# Altium PCB AL104_master_v10.PcbDoc
Units mm, origin at the board's own origin, x right, y up, seen from the top; angles counter-clockwise.
Board outline 160 x 70 mm, 2 copper layers (Top Layer, Bottom Layer); 32 components, 27 nets, 132 pads, 18 vias.
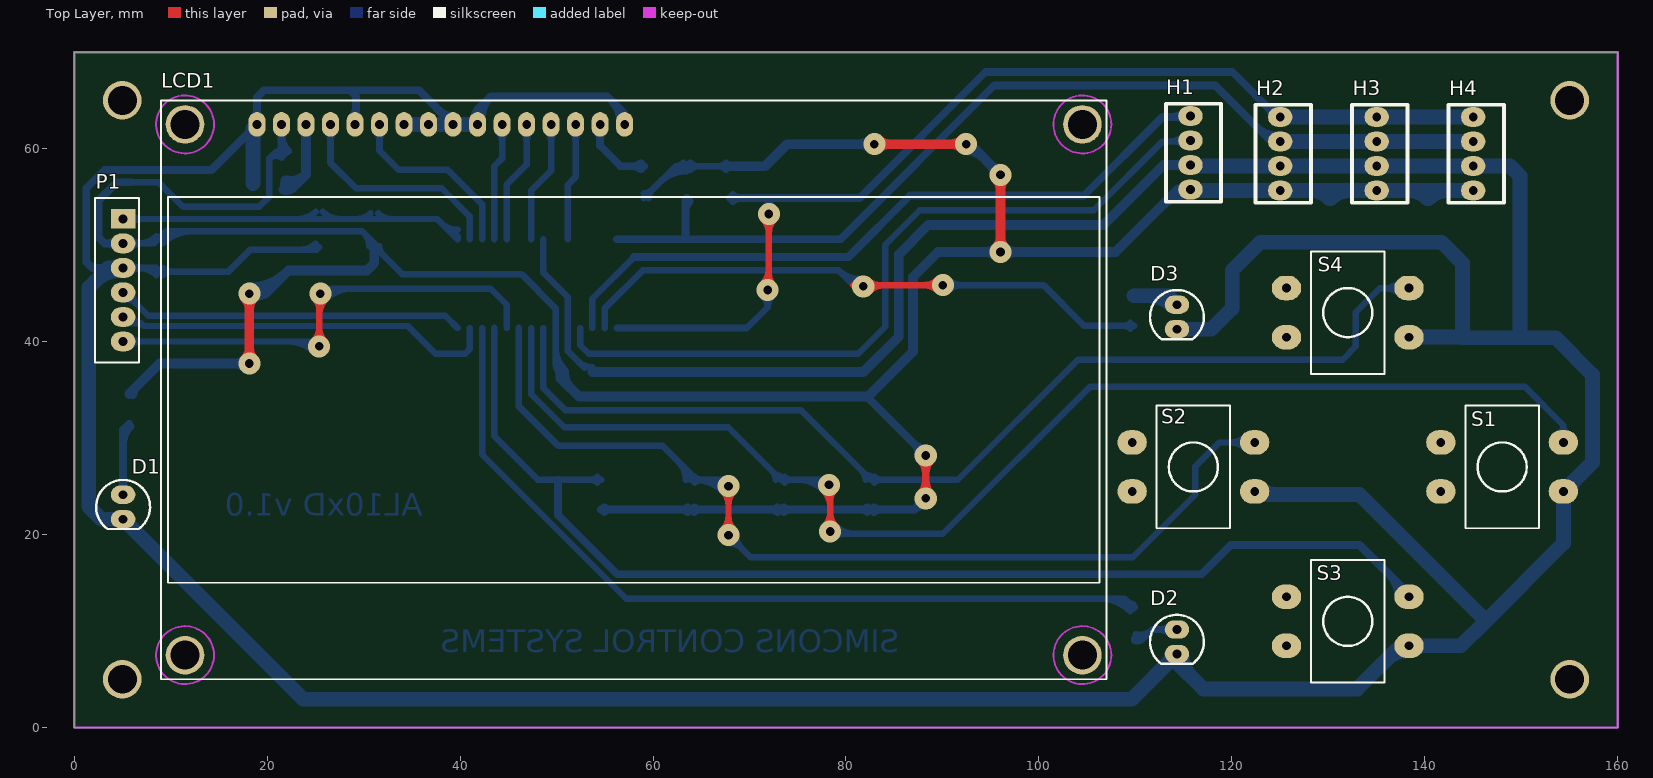
[diagram p0: Top Layer view]
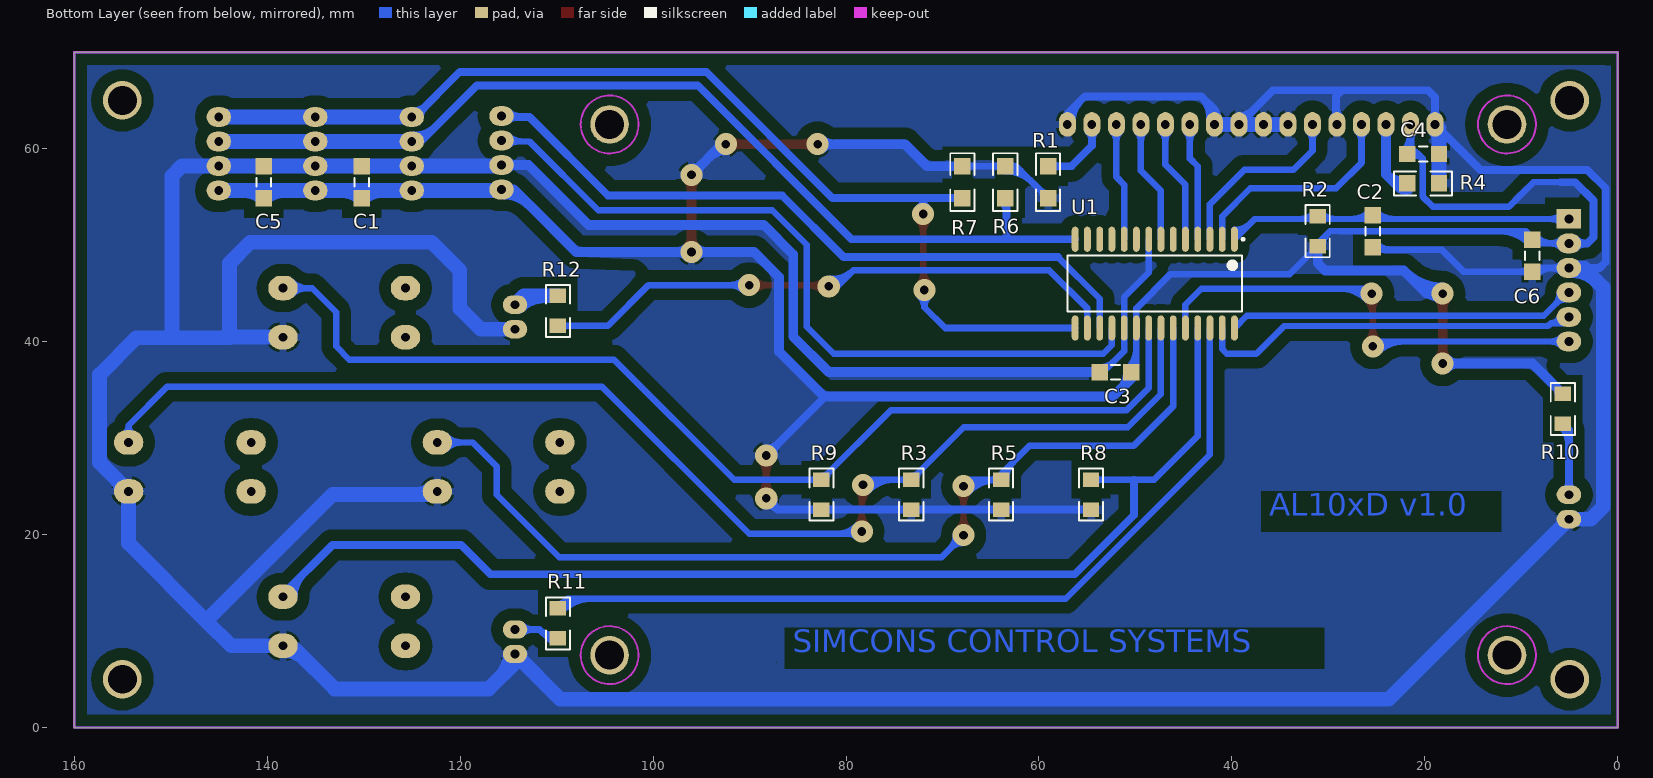
[diagram p1: Bottom Layer view, seen from below]
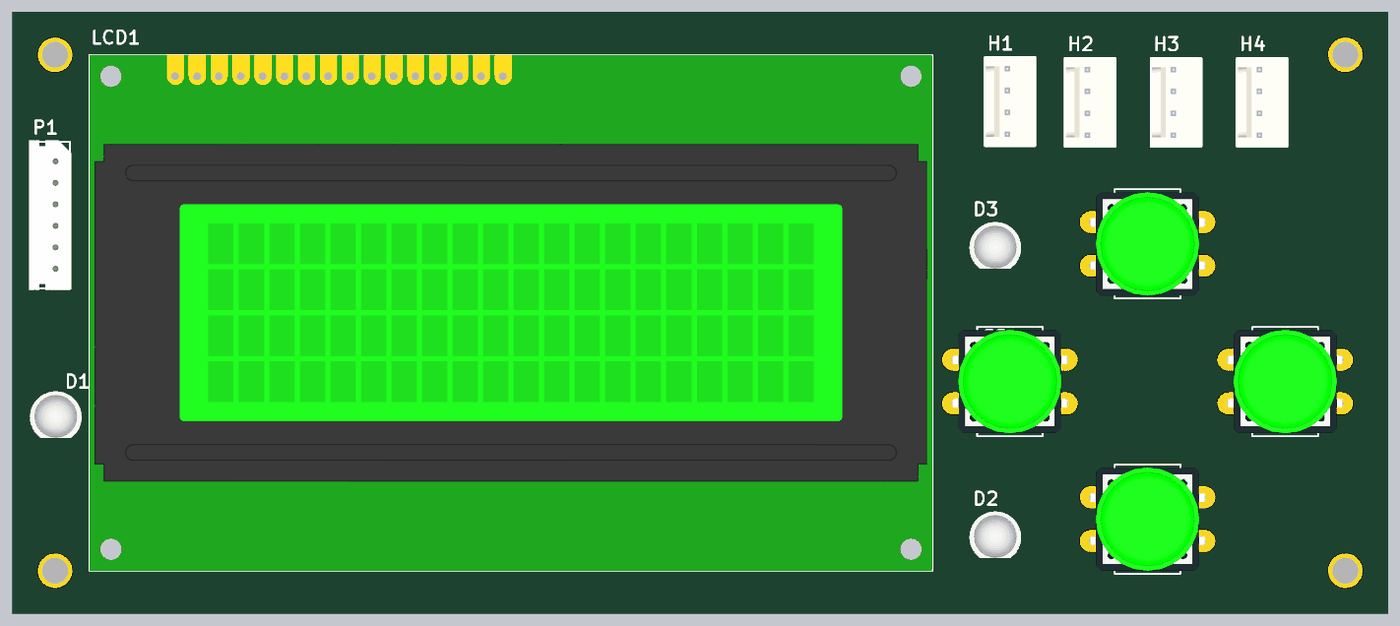
[diagram p2: 3D render of the assembled board from above, using the file's embedded part models]
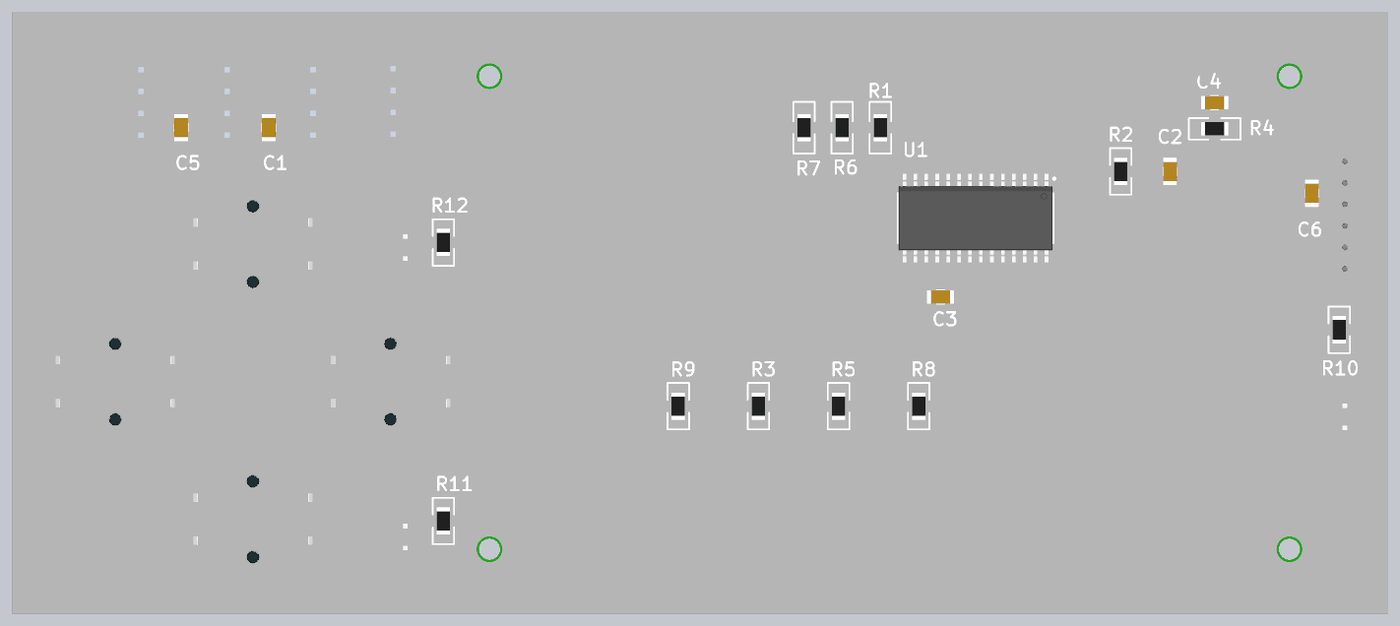
[diagram p3: 3D render of the assembled board from below, using the file's embedded part models]

## Layer stack, top to bottom
Top Solder: solder mask 0.0102, Solder Resist, Dk 3.5
Top Layer: signal copper 0.0356
Dielectric 1: dielectric 0.32, FR-4, Dk 4.8
Bottom Layer: signal copper 0.0356
Bottom Solder: solder mask 0.0102, Solder Resist, Dk 3.5

## Board outline
0,0 160,0 160,70 0,70

## Design rules (kind name [scope] priority, off if disabled: settings)
Clearance [All] p1: gap=0.406
PlaneConnect [All] p1: planeconnectstyle=Relief reliefexpansion=0.508 reliefentries=4 reliefconductorwidth=0.813 reliefairgap=0.254
PolygonConnect [All] p1: connectstyle=Relief reliefconductorwidth=0.813 reliefentries=4 polygonreliefangle="90 Angle" airgapwidth=0.254
RoutingVias [All] p1: holewidth=0.9 width=2.286 viastyle="Through Hole" minholewidth=0.9 minwidth=2.286 maxholewidth=3 maxwidth=4
SolderMaskExpansion [All] p1: expansion=0.102
Width [All] p1: maxlimit=1.524 minlimit=0.406 preferedwidth=0.457
28 further rules are at their usual default settings.

## Components (designator, comment, footprint, x,y, rotation, side; value= is the part's Value field where it differs from the comment)
C1 ".1uF 1206" C1206_S 130.175,56.515 r270 bottom
C2 ".1uF 1206" C1206_S 25.4,51.435 r90 bottom
C3 ".1uF 1206" C1206_S 52.07,36.83 r180 bottom
C4 ".1uF 1206" C1206_S 20.193,59.436 r0 bottom
C5 ".1uF 1206" C1206_S 140.335,56.515 r270 bottom
C6 ".1uF 1206" C1206_S 8.89,48.895 r90 bottom
D1 "LED0" LED5mmGREEN 5.08,22.86 r0 top
D2 "LED0" LED5mmGREEN 114.3,8.89 r0 top
D3 "LED0" LED5mmGREEN 114.3,42.545 r0 top
H1 "Header 4" CONNDEBUG 115.697,59.563 r0 top
H2 "Header 4" CONNDEBUG 125,59.46 r0 top
H3 "Header 4" CONNDEBUG 135,59.46 r0 top
H4 "Header 4" CONNDEBUG 145,59.46 r0 top
LCD1 "JHD 162A" LCD20X4 58,35 r0 top locked
P1 "Header, 6-Pin" CON_ICSP 5.08,52.705 r270 top
R1 "470E 1206" R1206 59.055,56.515 r270 bottom
R2 "100K 1206" R1206_W 31.115,51.435 r90 bottom
R3 "100K 1206" R1206_W 73.237,24.13 r90 bottom
R4 "470E 1206" R1206 20.193,56.388 r180 bottom
R5 "100K 1206" R1206_W 63.923,24.13 r90 bottom
R6 "4.7K 1206" R1206_S 63.5,56.515 r270 bottom
R7 "4.7K 1206" R1206_S 67.945,56.515 r270 bottom
R8 "100K 1206" R1206_W 54.61,24.13 r90 bottom
R9 "100K 1206" R1206_W 82.55,24.13 r90 bottom
R10 "100K 1206" R1206_W 5.715,33.02 r270 bottom
R11 "100K 1206" R1206_W 109.855,10.795 r270 bottom
R12 "100K 1206" R1206_W 109.855,43.18 r90 bottom
S1 "8MM DOM SWITCH" SWITCH_1 148,27 r180 top
S2 "8MM DOM SWITCH" SWITCH_1 116,27 r180 top
S3 "8MM DOM SWITCH" SWITCH_1 132,11 r180 top
S4 "8MM DOM SWITCH" SWITCH_1 132,43 r180 top
U1 "PIC16F886-I/SO" SOIC-SO28_M 48,46 r270 bottom

## Footprints (in the part's own frame and the unit in brackets; to place one, negate y for a bottom-side part, rotate by r counter-clockwise, add the part's x,y. Pads: shape width x height; smd on the part's side, far side on the other; paste and mask are expansions set on the pad)
C1206_S [mm] "Chip Capacitor, Body 3.2x1.6mm, IPC High Density"
  rect 1.7x1.7 smd: 1(-1.65,0) 2(1.65,0)
  silkscreen extent -0.44,-0.76 0.44,0.76, body extent -1.6,-0.8 1.6,0.8, height 1
CON_ICSP [mm] "Connector; Header; 6 Position"
  rect 2.032x2.54 hole 0.9: 1(0,0)
  oval 2.032x2.54 hole 0.9: 2(2.54,0) 3(5.08,0) 4(7.62,0) 5(10.16,0) 6(12.7,0)
  silkscreen extent -2.16,-2.92 14.86,1.65, body extent -2.35,-3.1 15.05,1.8, height 5.95
CONNDEBUG [mm] "Debug Connector"
  oval 2.54x2.032 hole 0.9: 1(0,3.81) 2(0,1.27) 3(0,-1.27) 4(0,-3.81)
  silkscreen extent -2.54,-5.08 3.17,5.08, body extent -2.49,-5.08 3.31,5.08, height 11.66
LCD20X4 [mm]
  oval 1.778x2.54 hole 0.9: 1(-39.04,27.5) 2(-36.5,27.5) 3(-33.96,27.5) 4(-31.42,27.5) 5(-28.88,27.5) 6(-26.34,27.5) 7(-23.8,27.5) 8(-21.26,27.5) 9(-18.72,27.5) 10(-16.18,27.5) 11(-13.64,27.5) 12(-11.1,27.5) 13(-8.56,27.5) 14(-6.02,27.5) 15(-3.48,27.5) 16(-0.94,27.5)
  round 4 hole 3 unplated: M1(-46.5,27.5) M2(46.5,27.5) M3(-46.5,-27.5) M4(46.5,-27.5)
  Keep-Out Layer circle w0.2: c46.5,27.5 r3
  Keep-Out Layer circle w0.2: c46.5,-27.5 r3
  Keep-Out Layer circle w0.2: c-46.5,-27.5 r3
  Keep-Out Layer circle w0.2: c-46.5,27.5 r3
  silkscreen extent -49,-30 49,30, body extent -49,-30 49,30, height 14.6
LED5mmGREEN [mm]
  oval 2.54x1.905 hole 0.9: 1(0,1.27) 2(0,-1.27)
  silkscreen extent -2.79,-2.29 2.79,2.79, body extent -3.01,-2.41 3.01,3.01, height 12.31
R1206 [mm] "Chip Capacitor, Body 3.2x1.6mm, IPC High Density"
  rect 1.7x1.7 smd: 1(-1.65,0) 2(1.65,0)
  silkscreen extent -3,-1.25 3,1.25, body extent -1.59,-0.77 1.59,0.77, height 0.63
R1206_S [mm] "Chip Capacitor, Body 3.2x1.6mm, IPC High Density"
  rect 1.7x1.7 smd: 1(-1.65,0) 2(1.65,0)
  silkscreen extent -3,-1.25 3,1.25, body extent -1.59,-0.77 1.59,0.77, height 0.63
R1206_W [mm] "Chip Capacitor, Body 3.2x1.6mm, IPC High Density"
  rect 1.5x1.7 smd: 1(-1.55,0) 2(1.55,0)
  silkscreen extent -2.7,-1.25 2.7,1.25, body extent -1.59,-0.77 1.59,0.77, height 0.63
SOIC-SO28_M [mm] "SOIC, 28-Leads, Body 17.9x7.5mm, Pitch 1.27mm, IPC Low Density"
  oval 2.6x0.7 smd: 1(-4.6,8.255) 2(-4.6,6.985) 3(-4.6,5.715) 4(-4.6,4.445) 5(-4.6,3.175) 6(-4.6,1.905) 7(-4.6,0.635) 8(-4.6,-0.635) 9(-4.6,-1.905) 10(-4.6,-3.175) 11(-4.6,-4.445) 12(-4.6,-5.715) 13(-4.6,-6.985) 14(-4.6,-8.255) 15(4.6,-8.255) 16(4.6,-6.985) 17(4.6,-5.715) 18(4.6,-4.445) 19(4.6,-3.175) 20(4.6,-1.905) 21(4.6,-0.635) 22(4.6,0.635) 23(4.6,1.905) 24(4.6,3.175) 25(4.6,4.445) 26(4.6,5.715) 27(4.6,6.985) 28(4.6,8.255)
  silkscreen extent -4.72,-9.05 2.9,9.28, body extent -5.15,-8.95 5.15,8.95, height 2.65
SWITCH_1 [mm]
  oval 3.048x2.54 hole 0.9: 1(-6.35,2.54) 2(-6.35,-2.54) 3(6.35,-2.54) 4(6.35,2.54)
  silkscreen extent -3.81,-6.35 3.81,6.35, body extent -6.94,-6 6.94,6, height 9.5

## Part data
C1 C2 C3 C4 C5 C6: library part Cap, "Capacitor"
D1 D2 D3: "Typical INFRARED GaAs LED"
H1 H2 H3 H4: "Header, 4-Pin"
LCD1: library part 162A, "16 char * 2 line LCD character display with b/light"
P1: library part "Header 6"
R1 R2 R3 R4 R5 R8 R9 R10 R11 R12: library part Res1, "Resistor"
R6 R7: library part "Res Semi", "Semiconductor Resistor"
S1 S2 S3 S4: library part SW-PB, "Switch"
U1: library part PIC16F886-I/SP, "Flash-Based, 8-Bit CMOS Microcontroller with nanoWatt Technology, 8K (x14-Bit words) Program Memory, 624 Bytes Data Memory, 24 I/O pins, 28-Pin SOIC, Standard VDD Range, Industrial Temperature"

## Free pads (board coordinates)
  round 4 hole 3: 0(5,5) 1(5,65) 2(155,65) 3(155,5)

## Via types
v1: diameter 2.286, hole 0.9, Top Layer to Bottom Layer, 18 vias

## Nets (pads, with @x,y where several pads share a name; then routed paths per layer and width w, separated by ;. In a path a pad name is that pad's centre, name@x,y a point inside that pad or via, vN(x,y) a via of type N, cw(c..) or ccw(c..) an arc to the next point about the centre after c; other vN are vias at no path point)
GND: C1.1 C2.1 C3.1 C4.1 C5.1 C6.1 D1.2 D2.2 D3.2 H1.3 H2.3 H3.3 H4.3 LCD1.1 LCD1.5 LCD1.7 LCD1.8 LCD1.9 LCD1.10 LCD1.16 P1.3 R4.2 S1.1 S2.1 S3.1 S4.1 U1.8 U1.19 | length 609.6
  Bottom Layer w0.686: P1.3 8.51,47.625 C6.1 16.003,47.245 18.288,49.53 25.145,49.53 C2.1 ; P1.3@5.81,47.149 cw(c6.959,46) 6.959,47.625 cw(c6.959,49.25) P1.3@5.81,48.101 ; 6.748,47.625 cw(c6.748,45.103) C6.1@8.531,46.886 ; C6.1@9.249,46.886 cw(c10.114,46.021) 10.114,47.245 cw(c10.114,48.469) C6.1@9.249,47.604 ; 23.56,49.53 ccw(c23.56,51.625) C2.1@25.041,50.144 ; U1.8 48.635,47.123 51.175,44.583 U1.19 51.175,38.995 C3.1@52.895,37.275 ; 52.206,37.964 ccw(c53.72,39.479) C3.1@53.72,37.337
  Bottom Layer w0.813: P1.3@4.35,47.244 ccw(c3.556,46.607) 3.556,47.625 ; P1.3@4.35,48.006 cw(c3.556,48.643) 3.556,47.625 ; P1.3@4.395,47.194 ccw(c3.354,46.153) 3.354,47.625 ccw(c3.354,49.097) P1.3@4.395,48.056 ; 17.486,61.026 cw(c18.96,59.551) LCD1.1@18.96,61.636 ; LCD1.1@18.619,63.222 ccw(c17.795,64.046) 18.96,64.046 ccw(c20.125,64.046) LCD1.1@19.301,63.222 ; LCD1.5@28.779,63.222 ccw(c27.738,64.263) 29.21,64.263 ; LCD1.5 29.21,62.59 29.21,65.405 28.575,66.04 ; 29.21,63.829 ccw(c30.068,63.829) LCD1.5@29.461,63.222 ; 37.806,63.974 ccw(c39.28,65.449) LCD1.9@39.28,63.364 ; LCD1.9 35.74,66.04 28.575,66.04 ; LCD1.10@41.479,63.223 ccw(c40.658,64.045) 41.82,64.045 ; LCD1.10@41.492,62.847 cw(c43.15,63.017) 41.971,64.196 ; LCD1.10 41.82,64.045 ; LCD1.10@42.161,63.223 cw(c42.982,64.045) 41.82,64.045 ; LCD1.10@42.3,62.93 cw(c45.343,63.242) 43.18,65.405 ; 55.735,64.915 cw(c53.701,62.881) LCD1.16@56.577,62.881 ; LCD1.16 57.06,63.59 55.245,65.405 43.18,65.405 ; 3.556,47.625 1.905,47.625 1.27,48.26 1.27,55.88 3.175,57.785 14.245,57.785 18.543,62.083 LCD1.1 18.96,65.315 19.685,66.04 28.575,66.04 ; 41.82,64.045 43.18,65.405
  Bottom Layer w1.016: C3.1 81.788,36.83 85.471,40.513 85.471,49.022 88.519,52.07 106.68,52.07 112.903,58.293 H1.3 ; H1.3@115.084,57.934 ccw(c114.217,57.067) 114.217,58.293 ccw(c114.217,59.519) H1.3@115.084,58.652
  Bottom Layer w1.524: 2.224,46.293 cw(c4.826,43.692) P1.3@4.826,47.371 ; P1.3 3.556,47.625 1.524,45.593 1.524,22.885 2.819,21.59 D1.2 23.749,2.921 109.601,2.921 D2.2 114.3,6.731 117.031,4 133,4 S3.1@137,8 ; R4.2 C4.1 LCD1.1@18.543,62.083 ; 18.543,60.806 cw(c20.273,60.806) LCD1.1@19.05,62.029 ; LCD1.7 LCD1.8 LCD1.9 LCD1.10 ; 113.433,6.753 ccw(c112.566,7.62) D2.2@113.792,7.62 ; D3.2 117.856,41.275 120.015,43.434 120.015,47.371 122.936,50.292 141.732,50.292 143.891,48.133 143.891,40.386 ; D2.2@114.808,7.62 ccw(c118.181,7.62) 115.796,5.235 ; H1.3@115.697,58.19 H2.3 H3.3 H4.3 148.82,58.19 149.86,57.15 149.86,40.64 149.606,40.386 ; S2.1@122.78,24.155 133.198,24.155 146.177,11.176 146.177,10.922 ; S2.1@122.963,24.819 ccw(c124.567,26.423) 124.567,24.155 ; 136.143,7.143 cw(c138.096,5.19) S3.1@138.096,7.952 ; S3.1 143.715,8.46 146.177,10.922 ; S4.1 143.817,40.46 143.891,40.386 ; S1.1@155.112,24.46 cw(c156.952,24.46) 155.651,25.761 ; 143.891,40.386 149.606,40.386 ; 146.177,10.922 154.35,19.095 S1.1 157.353,27.463 157.353,36.576 153.543,40.386 149.606,40.386
ICSP_PGM: P1.6 U1.24 | length 66.3
  Top Layer w0.66: v1@24.825,40.072 ccw(c23.438,41.459) 25.4,41.459 ccw(c27.362,41.459) v1@25.975,40.072 ; v1@24.952,44.383 cw(c23.871,43.302) 25.4,43.302 ; v1(25.4,39.497) v1@25.4,45.085 ; 25.4,42.689 cw(c27.796,42.689) v1@26.102,44.383
  Bottom Layer w0.66: P1.6 25.4,40.005 v1(25.4,39.497) ; P1.6@5.819,39.52 cw(c6.99,38.349) 6.99,40.005 cw(c6.99,41.661) P1.6@5.819,40.49 ; 22.211,40.005 cw(c22.211,36.308) v1@24.825,38.922 ; 23.806,40.005 cw(c23.806,37.903) v1@25.292,39.389 ; v1@25.635,44.85 cw(c27.121,43.364) 27.121,45.466 ; v1@25.908,45.466 43.18,45.466 44.825,43.821 U1.24 ; v1@26.102,44.383 cw(c28.716,41.769) 28.716,45.466
  other v1: 25.527,44.958
ICSPCLK: P1.5 U1.27 | length 42.3
  Bottom Layer w0.66: P1.5 5.715,41.91 6.939,41.91 ; P1.5@5.359,42.55 ccw(c6.136,42.702) 6.136,41.91 ; P1.5@6.007,42.677 ccw(c6.939,42.86) 6.939,41.91 ; U1.27 41.015,39.222 40.528,38.735 37.465,38.735 34.595,41.605 7.244,41.605 6.939,41.91
ICSPDAT: P1.4 U1.28 | length 38.8
  Bottom Layer w0.66: P1.4 5.273,45.085 7.686,42.672 38.473,42.672 U1.28 ; P1.4@5.334,44.399 cw(c5.334,42.892) 6.4,43.958 ; P1.4@6.02,45.085 ccw(c7.824,45.085) 6.548,43.809
KEY_DOWN: R8.2 S3.2 U1.25 | length 126.3
  Bottom Layer w0.686: U1.25 43.555,30.207 48.082,25.68 50.14,25.68 R8.2 ; R8.2@54.222,25.392 ccw(c53.527,24.697) 53.527,25.68 ccw(c53.527,26.663) R8.2@54.222,25.968
  Bottom Layer w0.813: 50.14,25.68 50.165,25.655 50.165,22.013 56.303,15.875 116.84,15.875 119.888,18.923 133.223,18.923 138.35,13.796 S3.2 ; 136.261,15.885 cw(c133.916,13.54) S3.2@137.232,13.54
KEY_EXIT: R3.2 S1.2 U1.22 | length 151.9
  Top Layer w0.66: v1@77.657,24.571 cw(c75.963,22.877) 78.359,22.877 ; v1@77.784,20.895 ccw(c76.397,22.282) 78.359,22.282 ccw(c80.321,22.282) v1@78.934,20.895 ; v1(78.232,25.146) 78.359,25.146 v1(78.359,20.32) ; 78.359,23.49 cw(c79.888,23.49) v1@78.807,24.571
  Bottom Layer w0.66: U1.22 47.365,34.55 50.8,31.115 67.802,31.115 R3.2 77.698,25.68 v1(78.232,25.146) ; 72.349,26.567 cw(c71.462,25.68) R3.2@72.717,25.68 ; R3.2@72.591,26.326 ccw(c73.137,26.872) R3.2@73.137,26.1 ; R3.2@73.634,25.383 cw(c74.35,24.667) 74.35,25.68 cw(c74.35,26.693) R3.2@73.634,25.977 ; 74.981,25.68 cw(c74.981,21.895) v1@77.657,24.571 ; 76.575,25.68 cw(c76.575,23.489) v1@78.124,25.038 ; v1(78.359,20.32) 78.613,20.066 90.043,20.066 105.283,35.306 150.368,35.306 154.35,31.324 ; v1@78.934,19.745 cw(c79.708,18.971) 79.708,20.066 ; v1@78.934,20.895 ccw(c80.934,22.895) 80.934,20.066 ; S1.2@153.819,30.315 ccw(c153.127,31.324) 154.35,31.324 ; S1.2 154.35,31.324 ; S1.2@154.881,30.315 cw(c155.573,31.324) 154.35,31.324
KEY_SET: R5.2 S2.2 U1.23 | length 122.6
  Top Layer w0.66: v1@67.243,20.514 ccw(c65.856,21.901) 67.818,21.901 ccw(c69.78,21.901) v1@68.393,20.514 ; v1@67.243,24.444 cw(c65.856,23.057) 67.818,23.057 cw(c69.78,23.057) v1@68.393,24.444 ; v1(67.818,19.939) v1(67.818,25.019)
  Bottom Layer w0.66: R5.2 67.157,25.68 v1(67.818,25.019) ; R5.2@64.26,25.68 cw(c64.26,21.461) v1@67.243,24.444 ; R5.2@64.32,25.383 cw(c65.037,24.667) 65.037,25.68 cw(c65.037,26.693) R5.2@64.32,25.977 ; 65.854,25.68 cw(c65.854,23.055) v1@67.71,24.911 ; v1@67.818,19.126 cw(c67.818,17.164) 69.206,18.551 cw(c70.593,19.939) v1@68.631,19.939 ; v1(67.818,19.939) 70.104,17.653 109.728,17.653 116.205,24.13 116.205,27.051 118.694,29.54 S2.2 ; S2.2@121.431,28.875 ccw(c119.827,27.271) 119.827,29.54 ccw(c119.827,31.809) S2.2@121.431,30.205
  Bottom Layer w0.686: U1.23 46.095,33.28 50.165,29.21 60.96,29.21 63.923,26.247 R5.2 ; 62.657,27.513 cw(c60.824,25.68) R5.2@63.416,25.68
KEY_UP: R9.2 S4.2 U1.21 | length 116.9
  Bottom Layer w0.66: U1.21 48.635,35.185 50.927,32.893 75.337,32.893 R9.2 91.593,25.68 104.038,38.125 131.47,38.125 132.842,39.497 132.842,43.053 135.329,45.54 S4.2 ; 81.663,26.567 cw(c80.775,25.68) R9.2@82.03,25.68 ; R9.2@81.904,26.326 ccw(c82.45,26.872) R9.2@82.45,26.1 ; R9.2@82.947,25.383 cw(c83.663,24.667) 83.663,25.68 cw(c83.663,26.693) R9.2@82.947,25.977 ; S4.2@137.431,44.875 ccw(c135.827,43.271) 135.827,45.54 ccw(c135.827,47.809) S4.2@137.431,46.205
LCD_DB#4: LCD1.11 U1.4 | length 14.3
  Bottom Layer w0.686: U1.4 43.555,58.16 44.36,58.965 LCD1.11 ; LCD1.11@43.974,61.733 cw(c43.042,60.801) 44.36,60.801 cw(c45.678,60.801) LCD1.11@44.746,61.733
LCD_DB#5: LCD1.12 U1.5 | length 14.8
  Bottom Layer w0.686: U1.5 44.825,56.255 46.9,58.33 LCD1.12 ; LCD1.12@46.514,61.733 cw(c45.582,60.801) 46.9,60.801 cw(c48.218,60.801) LCD1.12@47.286,61.733
LCD_DB#6: LCD1.13 U1.7 | length 14.8
  Bottom Layer w0.686: U1.7 47.365,55.62 49.44,57.695 LCD1.13 ; LCD1.13@49.054,61.733 cw(c48.122,60.801) 49.44,60.801 cw(c50.758,60.801) LCD1.13@49.826,61.733
LCD_DB#7: LCD1.14 U1.10 | length 14.3
  Bottom Layer w0.686: U1.10 51.175,56.255 51.98,57.06 LCD1.14 ; LCD1.14@51.594,61.733 cw(c50.662,60.801) 51.98,60.801 cw(c53.298,60.801) LCD1.14@52.366,61.733
LCD_E#: LCD1.6 U1.3 | length 21.3
  Bottom Layer w0.686: LCD1.6@31.274,61.733 cw(c30.342,60.801) 31.66,60.801 cw(c32.978,60.801) LCD1.6@32.046,61.733 ; LCD1.6 31.66,59.78 33.655,57.785 38.735,57.785 42.285,54.235 U1.3
LCD_RS#: LCD1.4 U1.2 | length 25.2
  Bottom Layer w0.686: LCD1.4@26.194,61.733 cw(c25.262,60.801) 26.58,60.801 cw(c27.898,60.801) LCD1.4@26.966,61.733 ; LCD1.4 26.58,58.51 29.21,55.88 38.1,55.88 41.015,52.965 U1.2
LED: R11.1 U1.26 | length 94.5
  Bottom Layer w0.66: U1.26 42.285,28.276 57.226,13.335 108.865,13.335 R11.1 ; 106.351,13.335 cw(c106.351,8.941) R11.1@109.458,12.048 ; 107.946,13.335 cw(c107.946,10.536) R11.1@109.925,12.515 ; 108.968,13.232 cw(c108.08,12.345) R11.1@109.335,12.345 ; R11.1@109.209,12.991 ccw(c109.755,13.537) R11.1@109.755,12.765
LED1: R12.1 U1.16 | length 78.5
  Top Layer w0.686: v1@80.772,45.847 v1(90.043,45.847) v1@90.805,45.847 ; v1@82.354,45.154 cw(c84.026,43.482) 84.026,45.847 ; v1@82.354,46.286 ccw(c83.413,47.345) 83.413,45.847 ; v1@89.477,45.281 ccw(c88.111,43.915) 88.111,45.847 ccw(c88.111,47.779) v1@89.477,46.413
  Bottom Layer w0.686: U1.16 54.985,43.428 58.928,47.371 79.248,47.371 ; 80.254,46.365 ccw(c81.566,47.677) v1@81.775,45.834 ; v1@81.698,46.515 cw(c81.361,49.483) 79.248,47.371 ; v1(81.788,45.72) 82.042,45.72 82.169,45.847 80.772,45.847 79.248,47.371 ; v1(90.043,45.847) 100.457,45.847 104.674,41.63 R12.1 ; v1@90.609,45.281 cw(c91.975,43.915) 91.975,45.847 cw(c91.975,47.779) v1@90.609,46.413 ; R12.1@109.467,41.342 ccw(c108.772,40.647) 108.772,41.63 ccw(c108.772,42.613) R12.1@109.467,41.918
M\C\L\R\: C2.2 P1.1 R2.2 U1.1 | length 47.7
  Bottom Layer w0.66: P1.1 37.64,52.705 U1.1 ; P1.1@5.819,52.22 cw(c6.99,51.049) 6.99,52.705 cw(c6.99,54.361) P1.1@5.819,53.19 ; 23.228,52.705 ccw(c23.228,55.257) C2.2@25.032,53.453 ; C2.2@25.768,53.453 ccw(c27.572,55.257) 27.572,52.705 ; 29.326,52.705 ccw(c29.326,54.674) R2.2@30.718,53.282 ; R2.2@31.512,53.282 ccw(c32.904,54.674) 32.904,52.705 ; 38.089,52.256 ccw(c39.745,53.911) U1.1@39.745,51.57 ; 39.217,51.128 ccw(c39.745,51.656) U1.1@39.745,50.909
NetD1_1: D1.1 R10.2 | length 11.8
  Bottom Layer w0.813: D1.1@4.694,24.516 ccw(c3.762,25.448) 5.08,25.448 ccw(c6.398,25.448) D1.1@5.466,24.516 ; D1.1 5.08,30.835 R10.2 ; 5.08,29.349 cw(c7.736,29.349) R10.2@5.858,31.227
NetD2_1: D2.1 R11.2 | length 11.4
  Bottom Layer w0.686: R11.2 110.845,9.245 ; R11.2@109.899,8.972 ccw(c110.112,10.008) 110.86,9.26 ; R11.2@110.037,9.644 ccw(c110.42,11.5) 111.76,10.16 ; R11.2@110.263,8.979 cw(c110.845,8.476) 110.845,9.245 ; R11.2@110.263,9.511 ccw(c110.845,10.014) 110.845,9.245 ; D2.1@113.551,9.729 ccw(c112.511,8.688) 112.511,10.16 ccw(c112.511,11.632) D2.1@113.551,10.591 ; D2.1 111.76,10.16 ; 110.845,9.245 111.76,10.16
NetD3_1: D3.1 R12.2 | length 7.6
  Bottom Layer w1.524: R12.2 113.385,44.73 D3.1 ; 111.314,44.73 cw(c111.314,41.146) D3.1@113.848,43.68
NetLCD1_3: LCD1.3 R4.1 | length 12.7
  Bottom Layer w1.016: R4.1@21.684,55.733 ccw(c21.954,56.843) 22.761,56.035 ; R4.1 23.114,56.388 24.04,57.314 ; R4.1@21.924,56.72 ccw(c22.454,58.9) 24.04,57.314 ; LCD1.3@23.771,61.85 cw(c23.12,61.199) 24.04,61.199 cw(c24.96,61.199) LCD1.3@24.309,61.85 ; LCD1.3 24.04,57.314
NetLCD1_15: LCD1.15 R1.1 | length 11.1
  Bottom Layer w0.813: LCD1.15@54.179,61.778 cw(c53.355,60.954) 54.52,60.954 cw(c55.685,60.954) LCD1.15@54.861,61.778 ; LCD1.15 54.52,60.288 56.643,58.165 R1.1 ; R1.1@58.741,57.851 ccw(c57.984,57.094) 57.984,58.165 ccw(c57.984,59.236) R1.1@58.741,58.479
RX: H1.2 U1.18 | length 82.1
  Bottom Layer w0.66: U1.18 52.445,39.63 53.34,38.735 81.28,38.735 84.074,41.529 84.074,50.038 87.63,53.594 105.664,53.594 112.8,60.73 H1.2@115.697,60.73 ; 113.539,60.73 ccw(c113.539,62.737) H1.2@114.958,61.318 ; 114.036,60.73 cw(c114.036,59.426) H1.2@114.958,60.348
SCL: H2.2 H3.2 H4.2 R6.2 U1.14 | length 105.7
  Bottom Layer w0.813: U1.14 63.373,50.6 ; 63.373,53.487 cw(c64.878,53.487) R6.2@63.814,54.551 ; R6.2 63.373,54.738 63.373,50.6 ; 122.526,62.259 ccw(c124.746,64.48) H2.2@124.746,61.34 ; H2.2 124.055,60.73 118.237,66.548 95.377,66.548 79.429,50.6 63.373,50.6
  Bottom Layer w1.524: H2.2 H3.2 H4.2
SDA: H2.1 H3.1 H4.1 R7.2 U1.15 | length 127.5
  Top Layer w0.686: v1@71.316,45.905 ccw(c69.644,47.577) 72.009,47.577 ; v1@71.443,52.647 cw(c70.077,51.281) 72.009,51.281 cw(c73.941,51.281) v1@72.575,52.647 ; v1(71.882,45.339) 71.882,45.974 72.009,46.101 v1(72.009,53.213) ; 72.009,46.964 ccw(c73.507,46.964) v1@72.448,45.905
  Bottom Layer w0.686: U1.15 69.721,41.4 71.882,43.561 ; v1@71.351,44.74 cw(c70.307,43.561) 71.882,43.561 ; v1@71.513,53.841 ccw(c70.704,54.865) 72.009,54.865 ; v1(71.882,45.339) 71.882,43.561 ; v1@71.882,45.974 v1@72.009,46.101 ; v1(72.009,53.213) 72.009,54.865 ; v1@72.413,44.74 ccw(c73.457,43.561) 71.882,43.561 ; v1@72.505,53.841 cw(c73.314,54.865) 72.009,54.865
  Bottom Layer w0.813: R7.2 72.009,54.865 81.408,54.865 94.488,67.945 120.015,67.945 124.69,63.27 H2.1 ; R7.2@68.259,54.551 cw(c69.016,53.794) 69.016,54.865 cw(c69.016,55.936) R7.2@68.259,55.179 ; 123.61,64.35 ccw(c124.746,65.487) H2.1@124.746,63.88 ; 123.745,64.215 cw(c122.8,63.27) H2.1@124.136,63.27
  Bottom Layer w1.524: H2.1 H3.1 H4.1
TX: H1.1 U1.17 | length 75.1
  Bottom Layer w0.66: U1.17 53.715,44.444 58.039,48.768
  Bottom Layer w0.813: 58.039,48.768 80.264,48.768 86.614,55.118 104.648,55.118 112.8,63.27 H1.1@115.697,63.27 ; 113.723,63.27 ccw(c113.723,65.093) H1.1@115.012,63.804 ; 114.22,63.27 cw(c114.22,62.15) H1.1@115.012,62.942
VCC: C1.2 C3.2 C4.2 C5.2 C6.2 H1.4 H2.4 H3.4 H4.4 LCD1.2 P1.2 R1.2 R2.1 R3.1 R5.1 R6.1 R7.1 R8.1 R9.1 R10.1 U1.20 | length 444
  Top Layer w0.813: v1@87.744,24.27 ccw(c86.487,25.527) 88.265,25.527 ccw(c90.043,25.527) v1@88.786,24.27 ; v1@87.744,27.673 cw(c86.487,26.416) 88.265,26.416 cw(c90.043,26.416) v1@88.786,27.673 ; v1(88.265,23.749) v1(88.265,28.194)
  Top Layer w1.016: v1@17.712,38.168 ccw(c16.628,39.252) 18.161,39.252 ccw(c19.694,39.252) v1@18.61,38.168 ; v1@17.712,44.509 cw(c16.628,43.425) 18.161,43.425 cw(c19.694,43.425) v1@18.61,44.509 ; v1(18.161,37.719) v1(18.161,44.958) ; v1@82.55,60.452 v1(82.931,60.452) v1(92.456,60.452) ; v1@83.38,60.003 cw(c84.464,58.919) 84.464,60.452 cw(c84.464,61.985) v1@83.38,60.901 ; v1@92.007,60.003 ccw(c90.923,58.919) 90.923,60.452 ccw(c90.923,61.985) v1@92.007,60.901 ; v1@95.563,49.725 ccw(c94.479,50.809) 96.012,50.809 ccw(c97.545,50.809) v1@96.461,49.725 ; v1@95.563,56.828 cw(c94.479,55.744) 96.012,55.744 cw(c97.545,55.744) v1@96.461,56.828 ; v1(96.012,49.276) v1(96.012,57.277)
  Bottom Layer w0.66: P1.2 8.255,50.165 9.525,51.435 ; P1.2@5.819,49.68 cw(c6.99,48.509) 6.99,50.165 cw(c6.99,51.821) P1.2@5.819,50.65 ; 6.718,50.165 ccw(c6.718,52.717) C6.2@8.522,50.913 ; C6.2@8.791,50.644 cw(c10.699,48.736) 10.699,51.435 ; C6.2@9.258,50.177 cw(c12.294,47.141) 12.294,51.435 ; C6.2@9.375,50.731 cw(c9.992,50.968) 9.525,51.435 ; 30.03,51.25 cw(c28.664,49.885) R2.1@30.595,49.885 ; R2.1@31.255,50.025 29.845,51.435 9.525,51.435 ; C3.2@49.905,37.585 U1.20 ; 49.905,37.734 ccw(c51.324,37.734) C3.2@50.321,36.731 ; 49.905,39.328 ccw(c52.918,39.328) C3.2@50.788,37.198
  Bottom Layer w0.686: 5.969,56.515 8.763,56.515 11.303,53.975 19.177,53.975 20.244,55.042 20.244,58.979 ; 20.78,59.515 cw(c21.401,58.894) C4.2@21.956,59.574 ; C4.2@21.467,59.096 ccw(c20.701,58.404) 20.701,59.436 ; C4.2@21.467,59.776 cw(c20.701,60.468) 20.701,59.436 ; C4.2@21.522,59.043 ccw(c20.919,58.304) 20.244,58.979 ; C4.2 20.701,59.436 ; R2.1 34.01,46.99 46.355,46.99 49.905,43.44 U1.20 ; R2.1@31.215,49.478 cw(c31.215,48.737) R2.1@31.739,49.261 ; R2.1@31.622,49.885 ccw(c32.846,49.885) 31.981,49.019 ; R1.2 62.355,58.165 ; R1.2@59.055,55.372 ccw(c59.055,56.596) 59.921,55.731 ccw(c60.786,54.865) R1.2@59.562,54.865 ; 60.68,56.49 cw(c63.5,53.669) R6.1@63.5,57.658 ; 61.85,57.66 cw(c63.5,56.011) R6.1@63.5,58.344 ; R6.1@63.124,57.824 ccw(c62.355,57.126) 62.355,58.165 ; R6.1@63.124,58.506 cw(c62.355,59.204) 62.355,58.165 ; R6.1@63.859,57.806 cw(c64.724,56.941) 64.724,58.165 cw(c64.724,59.389) R6.1@63.859,58.524 ; R7.1@67.586,57.806 ccw(c66.721,56.941) 66.721,58.165 ccw(c66.721,59.389) R7.1@67.586,58.524 ; R7.1 R6.1 62.355,58.165 ; 20.244,58.979 20.701,59.436
  Bottom Layer w0.813: P1.2@4.395,49.734 ccw(c3.354,48.693) 3.354,50.165 ccw(c3.354,51.637) P1.2@4.395,50.596 ; P1.2 3.175,50.165 2.54,50.8 2.54,54.61 4.445,56.515 5.969,56.515 ; LCD1.2@21.159,61.778 cw(c20.335,60.954) 21.5,60.954 cw(c22.665,60.954) LCD1.2@21.841,61.778 ; C4.2@21.5,60.235 LCD1.2 ; LCD1.2@21.5,61.335 ccw(c23.742,61.335) C4.2@22.157,59.75 ; R8.1 R5.1 R3.1 R9.1 87.096,22.58 ; R8.1@54.953,22.337 cw(c55.54,21.75) 55.54,22.58 cw(c55.54,23.41) R8.1@54.953,22.823 ; R5.1@63.58,22.337 ccw(c62.994,21.75) 62.994,22.58 ccw(c62.994,23.41) R5.1@63.58,22.823 ; R5.1@64.266,22.337 cw(c64.853,21.75) 64.853,22.58 cw(c64.853,23.41) R5.1@64.266,22.823 ; R3.1@72.894,22.337 ccw(c72.307,21.75) 72.307,22.58 ccw(c72.307,23.41) R3.1@72.894,22.823 ; R3.1@73.58,22.337 cw(c74.166,21.75) 74.166,22.58 cw(c74.166,23.41) R3.1@73.58,22.823 ; 82.169,34.29 v1(88.265,28.194) ; R9.1@82.207,22.337 ccw(c81.62,21.75) 81.62,22.58 ccw(c81.62,23.41) R9.1@82.207,22.823 ; R9.1@82.893,22.337 cw(c83.48,21.75) 83.48,22.58 cw(c83.48,23.41) R9.1@82.893,22.823 ; v1@87.528,28.194 ccw(c85.75,28.194) 87.008,29.451 ccw(c88.265,30.709) v1@88.265,28.931 ; v1@87.529,23.71 cw(c86.045,23.631) 87.096,22.58 ; v1@88.226,23.013 ccw(c88.147,21.529) 87.096,22.58 ; v1(88.265,23.749) 87.096,22.58
  Bottom Layer w1.016: R10.1 8.864,37.719 v1(18.161,37.719) ; R10.1@6.057,34.57 cw(c6.883,34.57) R10.1@6.299,35.154 ; v1@17.712,37.27 ccw(c16.628,36.186) 16.628,37.719 ccw(c16.628,39.252) v1@17.712,38.168 ; v1@18.161,44.577 ccw(c18.161,47.643) 20.329,45.475 ; v1(18.161,44.958) 19.812,44.958 22.225,47.371 30.353,47.371 31.115,48.133 R2.1 ; v1@18.161,45.593 ccw(c18.161,51.112) 22.063,47.209 ; v1@18.61,44.509 cw(c19.694,43.425) 19.694,44.958 cw(c19.694,46.491) v1@18.61,45.407 ; C3.2 50.42,36.194 52.324,34.29 82.169,34.29 82.296,34.29 86.957,38.951 86.957,46.698 89.535,49.276 v1(96.012,49.276) 107.95,49.276 114.427,55.753 H1.4 ; C3.2@50.762,36.83 ccw(c53.123,36.83) 51.454,35.16 ; R7.1 71.627,58.165 73.914,60.452 v1(82.931,60.452) ; v1@82.482,60.003 ccw(c81.398,58.919) 81.398,60.452 ccw(c81.398,61.985) v1@82.482,60.901 ; v1@92.456,59.817 cw(c92.456,57.364) 94.19,59.099 ; v1(92.456,60.452) 92.837,60.452 v1(96.012,57.277) ; v1@95.377,57.277 ccw(c93.844,57.277) 94.928,58.361 ccw(c96.012,59.445) v1@96.012,57.912 ; v1@95.563,48.827 ccw(c94.479,47.743) 94.479,49.276 ccw(c94.479,50.809) v1@95.563,49.725 ; v1@96.461,48.827 cw(c97.545,47.743) 97.545,49.276 cw(c97.545,50.809) v1@96.461,49.725 ; 112.841,54.167 cw(c115.443,51.566) H1.4@115.443,55.245
  Bottom Layer w1.524: H1.4@115.697,55.65 H2.4 H3.4 H4.4 ; 128.067,55.65 cw(c128.067,52.757) C1.2@130.113,54.803 ; C1.2@130.237,54.803 cw(c132.283,52.757) 132.283,55.65 ; 138.227,55.65 cw(c138.227,52.757) C5.2@140.273,54.803 ; C5.2@140.397,54.803 cw(c142.443,52.757) 142.443,55.65
pads on no net: LCD1.M1 LCD1.M2 LCD1.M3 LCD1.M4 S1.3 S1.4 S2.3 S2.4 S3.3 S3.4 S4.3 S4.4 U1.6 U1.9 U1.11 U1.12 U1.13
copper on no net: | length 460
  Bottom Layer w0.254: 0,0 0,70 160,70 160,0 0,0

## Polygon pours and split planes (outlines as drawn)
GND on Bottom Layer "Top Layer-No Net 1" (solid, remove dead copper, pour order 2): 0,0 160,0 160,70 0,70
GND on Bottom Layer "Top Layer-No Net 1" (solid, remove dead copper, pour order 4): 1.358,1.358 0.776,1.358 0.762,1.372 0.762,8.839 0.762,68.58 1.524,68.58 1.676,68.58 2.134,68.123 1.524,67.513 1.524,64.922 1.676,64.77 1.676,45.745 1.676,24.384 1.981,24.079 1.676,23.774 1.676,5.791 1.676,1.676 1.358,1.358
GND on Bottom Layer "Top Layer-No Net 1" (solid, pour order 6): 31.242,9.449 31.242,6.706 88.392,6.706 88.697,6.401 88.697,3.81 30.023,3.81 26.822,7.01 28.499,8.687 28.499,12.954 30.937,12.954 31.242,13.259
GND on Bottom Layer "Top Layer-No Net 1" (solid, pour order 8): 86.411,6.045 88.138,7.772 90.83,7.772 90.83,9.754 88.849,11.735 88.697,11.582 85.192,11.582 30.328,11.582 30.023,11.887 30.023,9.296 30.937,9.296 31.242,9.601 31.394,9.754 71.628,9.754 85.344,9.754 85.801,9.296 85.649,9.144 85.649,5.791
GND on Bottom Layer "Top Layer-No Net 1" (solid, pour order 10): 10.058,20.879 36.424,20.879 36.424,24.232 36.424,26.975 36.881,27.432 39.624,24.689 39.624,23.927 39.624,17.526 39.472,17.374 10.058,17.374
GND on Bottom Layer "Top Layer-No Net 1" (solid, pour order 12): 12.497,19.355 12.802,19.66 12.802,23.774 38.1,23.774 38.71,24.384 34.595,28.499 32.004,28.499 12.954,28.499 9.906,25.451 9.601,25.146 9.601,19.66
VCC on Bottom Layer "Top Layer-No Net 1" (solid, remove dead copper, pour order 14): 31.242,12.344 94.945,12.344 120.853,38.252 121.31,38.71 121.31,67.208 15.697,67.208 11.125,62.636 2.438,53.95 2.438,15.392

## Keep-outs
Keep-Out Layer:
  the board outline again, w0.254

## Other copper
Bottom Layer:
  text "AL10xD v1.0" at 36.119,21.184 h4
  text "SIMCONS CONTROL SYSTEMS" at 85.496,7.01 h4

## Silkscreen, mask and mechanical layers (free items; w line width, h text height)
Bottom Paste:
  rectangle: 0,0 160,70